# EAGLE board lidar (EAGLE 9.3.0)
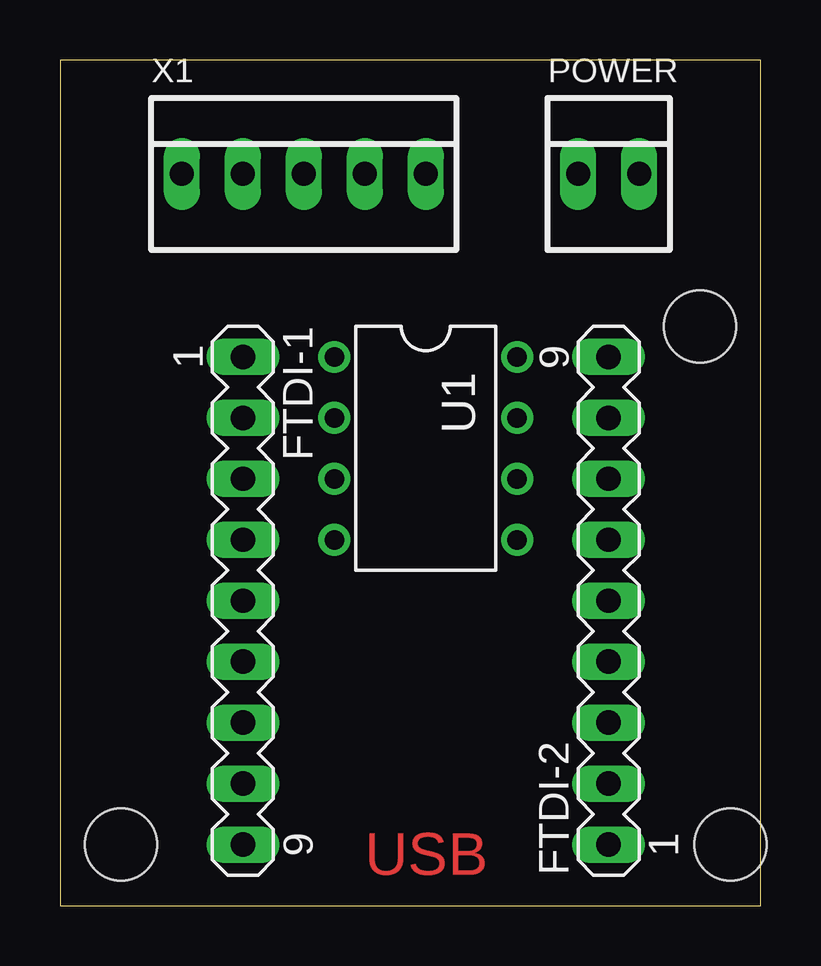
[diagram p0: board, top side]
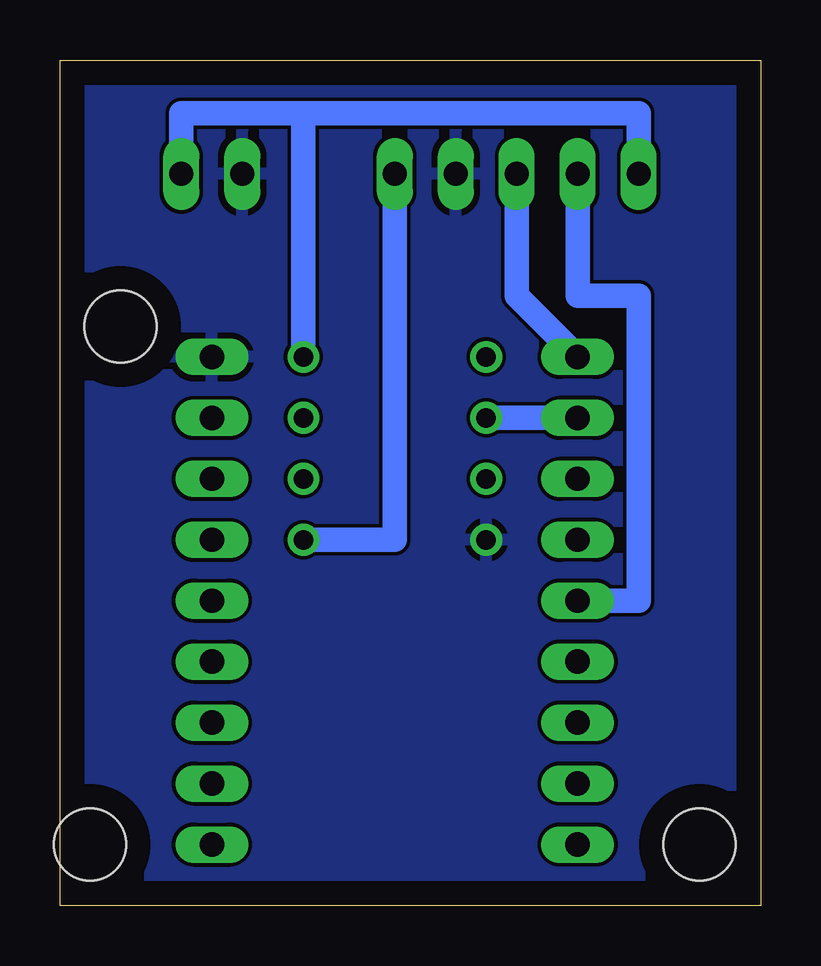
[diagram p1: board, bottom side, seen from below]

Size 29.19 x 35.23 mm. Coordinates in mm from the lower left corner, seen from the top.
Outline: 0,0 29.19,0 29.19,35.23 0,35.23 0,0
Copper layers (1*16): Top 0.035mm / dielectric 1.5mm / Bottom 0.035mm
Design rules "default": minimum track width 6mil, minimum drill 0.35mm, track to track 6mil, track to pad 6mil, pad to pad 6mil, via to via 6mil, smd to smd 6mil, copper to edge 40mil, drill to drill 6mil, minimum pad ring 10mil, minimum via ring 8mil, stop-mask expansion 4mil, vias tented up to drill 0mil, thermal gap 10mil
Holes 3 mm at 2.54,2.54 27.94,2.54 26.67,24.13

## Footprints (pad centres in the part's own frame; a part is rotated, then mirrored left to right if it is on the bottom)
MA09-1 = drill 1.016 long: 1 -10.16,0; 2 -7.62,0; 3 -5.08,0; 4 -2.54,0; 5 0,0; 6 2.54,0; 7 5.08,0; 8 7.62,0; 9 10.16,0
22-23-2021 = drill 1 long: 1 -1.27,0; 2 1.27,0
PDIP08_300MIL = drill 0.813: 1 -3.81,-3.81; 2 -1.27,-3.81; 3 1.27,-3.81; 4 3.81,-3.81; 5 3.81,3.81; 6 1.27,3.81; 7 -1.27,3.81; 8 -3.81,3.81
22-23-2051 = drill 1 long: 1 -5.08,0; 2 -2.54,0; 3 0,0; 4 2.54,0; 5 5.08,0

## Placement (x,y rotation side)
FTDI-1  [MA09-1]  7.62,12.7 270 top
FTDI-2  [MA09-1]  22.86,12.7 90 top
POWER  22-23-2021  [22-23-2021]  22.86,30.48 0 top
U1  ATTINY85-20P  [PDIP08_300MIL]  15.24,19.05 270 top
X1  22-23-2051  [22-23-2051]  10.16,30.48 0 top

## Library data of the parts
FTDI-1 FTDI-2 = con-lstb; OC_FARNELL: unknown; OC_NEWARK: unknown
POWER = con-molex; MF: MOLEX; MPN: 22-23-2021; OC_FARNELL: 1462926; OC_NEWARK: 25C3832
U1 = _hhn_attiny25_45_85
X1 = con-molex; MF: MOLEX; MPN: 22-23-2051; OC_FARNELL: 1462952; OC_NEWARK: 38C9178

## Nets
GND: FTDI-2.9 POWER.1 U1.4 X1.4
N$2: FTDI-1.2 U1.2
N$3: POWER.2 U1.8 X1.1
N$4: FTDI-1.5 X1.2
N$5: FTDI-1.1 X1.3
N$7: U1.5 X1.5

## Tracks (layer width: path | path; a pad name or v marks a point on that pad's centre or on a via)
GND
  pour Bottom: 0,35.56 29.21,35.56 29.21,0 0,0
N$2
  Bottom 1.016: U1.2 FTDI-1.2
N$3
  Bottom 1.016: X1.1 5.08,33.02 19.05,33.02 | 19.05,33.02 24.13,33.02 POWER.2 | U1.8 19.05,33.02
N$4
  Bottom 1.016: FTDI-1.5 5.08,12.7 5.08,25.4 7.62,25.4 X1.2
N$5
  Bottom 1.016: X1.3 10.16,25.4 FTDI-1.1
N$7
  Bottom 1.016: U1.5 15.24,15.24 X1.5

## Text on the board
Top: USB